# Altium PCB OK6010_DB.PcbDoc (part 4 of 4)
Units mil, origin at the board's own origin, x right, y up, seen from the top; angles counter-clockwise.
Board outline 4000 x 5500 mil, 4 copper layers (Top Layer, Ground Plane, Power Plane, Bottom Layer), stack 34.2 mil thick; 268 components, 248 nets, 1028 pads, 599 vias.
Unrouted connection lines stored in the file: 10.
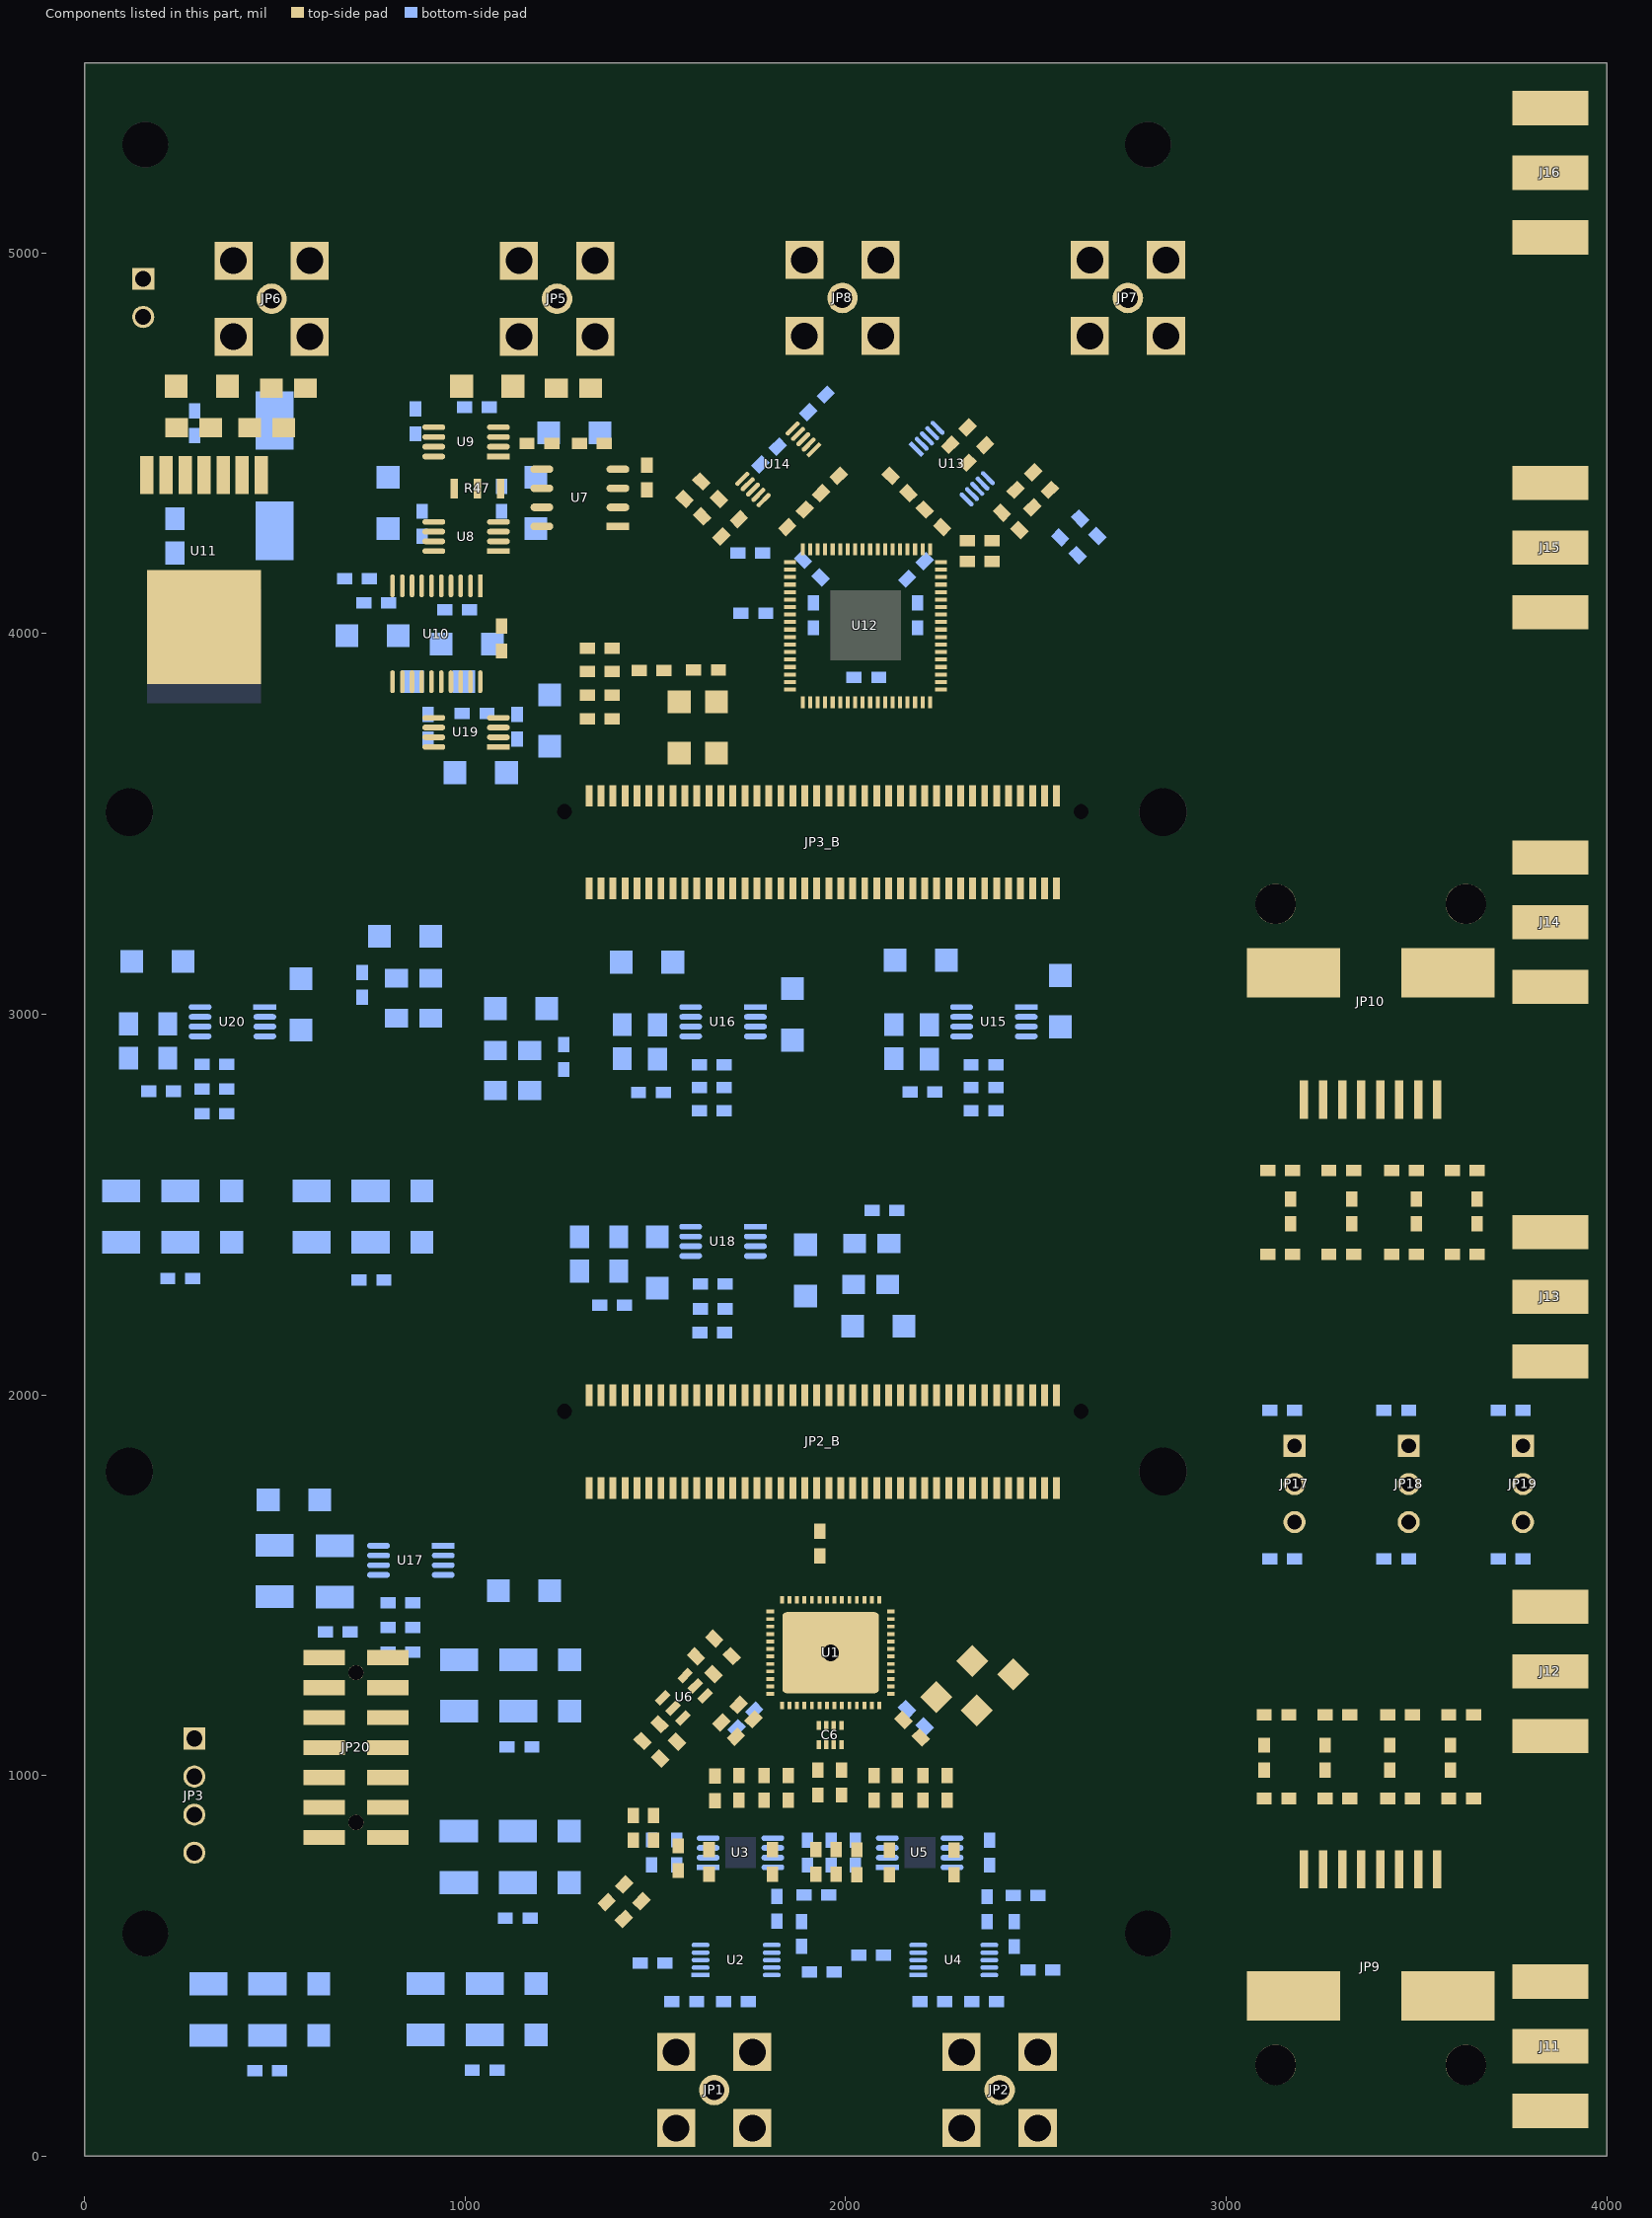
[diagram p6: the components of this part, seen from the top]

## Silkscreen, mask and mechanical layers (free items; w line width, h text height) (continued)
Bottom Overlay:
  lines w8: 407,2643 437,2673 ; 1046,1581 1070,1570 ; 1266,3295 1278,3283 1290,3283 ; 1277,1701 1301,1701 ; 1299,954.74 1364,954.74 ; 1299,1406 1364,1406 ; 1321,3307 1322,3307 1340,3289 ; 1377,3300 1379,3300 1386,3293 ; 1430,2101 1460,2071 ; 1456,1682 1456,1681 1482,1655 ; 1502,2070 1502,2107 ; 1525,2035 1525,2045 1535,2055 ; 1665,2065 1675,2065 1685,2055 1685,2050 ; 2020,2060 2020,2090
  text "+" at 1124,4566 h40 r270
  text "+" at 726,4474 h40 r270
  text "+" at 556,4216 h40 r270
  text "+" at 1218,4186 h40 r270
  text "+" at 845,4058 h40 r270
  text "+" at 875,4036 h40 r270
  text "+" at 766,3857 h40 r270
  text "VDC" at 1378.5,3627 h40 r270
  text "3.3VDD" at 1471,3622 h40 r270
  text "+" at 1255,3614 h40 r270
  text "+" at 878,3570 h40 r270
  text "CVDD18" at 1099,3314 h40
  text "+1.2VDD" at 1287,3314 h40 r270
  text "AGND" at 1509.5,3309 h40 r270
  text "SYS_CLK5" at 1342,3308 h40 r270
  text "USB_SCL" at 1398.5,3308 h40 r270
  text "USB_SDA" at 1455,3308 h40 r270
  text "AGND" at 1232.05,3303.54 h40 r270
  text "DVDD25" at 604,3255 h40
  text "+" at 966,3244 h40 r270
  text "AVDD33" at 2821,3191.2 h40
  text "+" at 2322,3181 h40 r270
  text "+" at 315,3178 h40 r270
  text "+" at 1602,3176 h40 r270
  text "DVDD18" at 1265,3136 h40
  text "+5" at 82,3038 h40
  text "+" at 984,3002 h40 r270
  text "+5" at 2017,2877.2 h40 r270
  text "+5" at 1310,2874 h40 r270
  text "DVDD33" at 1930,2811.2 h40 r270
  text "+12" at 547,2660 h40
  text "-12" at 1022,2611.1 h40
  text "+" at 419,2599 h40 r270
  text "+" at 1460,2478 h40 r270
  text "+5" at 1191,2319.2 h40 r270
  text "+" at 919,2311 h40 r270
  text "+" at 1923,2116 h40 r270
  text "AGND" at 1662.46,2086.05 h40
  text "SYS_CLK4" at 1418,2083.05 h40
  text "WR2_IN" at 1720,2038 h40 r90
  text "A0_IN" at 1598.95,2037 h40 r90
  text "WR1_IN" at 1656.95,2036 h40 r90
  text "A1_IN" at 1543.95,2022 h40 r90
  text "AGND" at 1289.46,2020.05 h40
  text "OVDD" at 2152,2008 h40
  text "3.3VDD" at 1266.45,1915 h40 r90
  text "+" at 637,1787 h40 r270
  text "GND" at 1627.46,1672.05 h40
  text "BANK1_VREF" at 1824,1607.05 h40
  text "AV18" at 1220,1550 h40
  text "+5" at 363,1506 h40 r270
  text "AVDD18" at 1596,1386 h40
  text "+" at 1307,1367 h40 r270
  text "+5" at 439,1075 h40
  text "+12" at 464,982 h40
  text "+5" at 1442,933 h40
  text "+" at 1306,917 h40 r270
  text "GND" at 464,882 h40
  text "-12" at 464,782 h40
  text "+5" at 859,751 h40 r270
  text "+" at 648,516 h40 r270
  text "-12" at 1365,387 h40
  text "+12" at 791,385 h40
  text "+" at 1219,230 h40 r270
Top Solder:
  rectangle: 25,3610 575,4100
  rectangle: 1580,2410 1715,2480
  rectangle: 1500,2480 1785,2560
  rectangle: 675,1570 900,1635
  rectangle: 675,1635 1015,1825
Bottom Solder:
  rectangle: 25,3610 575,4100
  rectangle: 1498,2476 1788,2561
  rectangle: 1578,2407 1718,2479
  rectangle: 675,1570 900,1635
  rectangle: 675,1635 1015,1825
Mechanical 1:
  lines w8: 0,0 753,0 4000,0 4000,5500 1193,5500 0,5500 0,3649.5 0,1681 0,0
Mechanical 2:
  circle w8: c2795,5285 r140
  circle w8: c160,5285 r140
  circle w8: c160,585 r140
  circle w8: c2795,585 r140
Mechanical 3:
  lines w8: -83.46,2188.87 -151.57,2188.87 ; 0,1681 2952.76,1681 ; 0,2188.87 -151.57,2188.87 ; 0,2661.32 -151.57,2661.32 -151.57,2188.87 ; 0,2862.1 -151.57,2862.1 -151.57,3216.43 0,3216.43 ; 2877.95,1681 2877.95,1772.73